# Altium PCB PCB1.PcbDoc
Units mm, origin at the board's own origin, x right, y up, seen from the top; angles counter-clockwise.
Board outline 85.6 x 54 mm, 2 copper layers (Top Layer, Bottom Layer), stack 0.871 mm thick; 37 components, 35 nets, 188 pads, 12 vias.
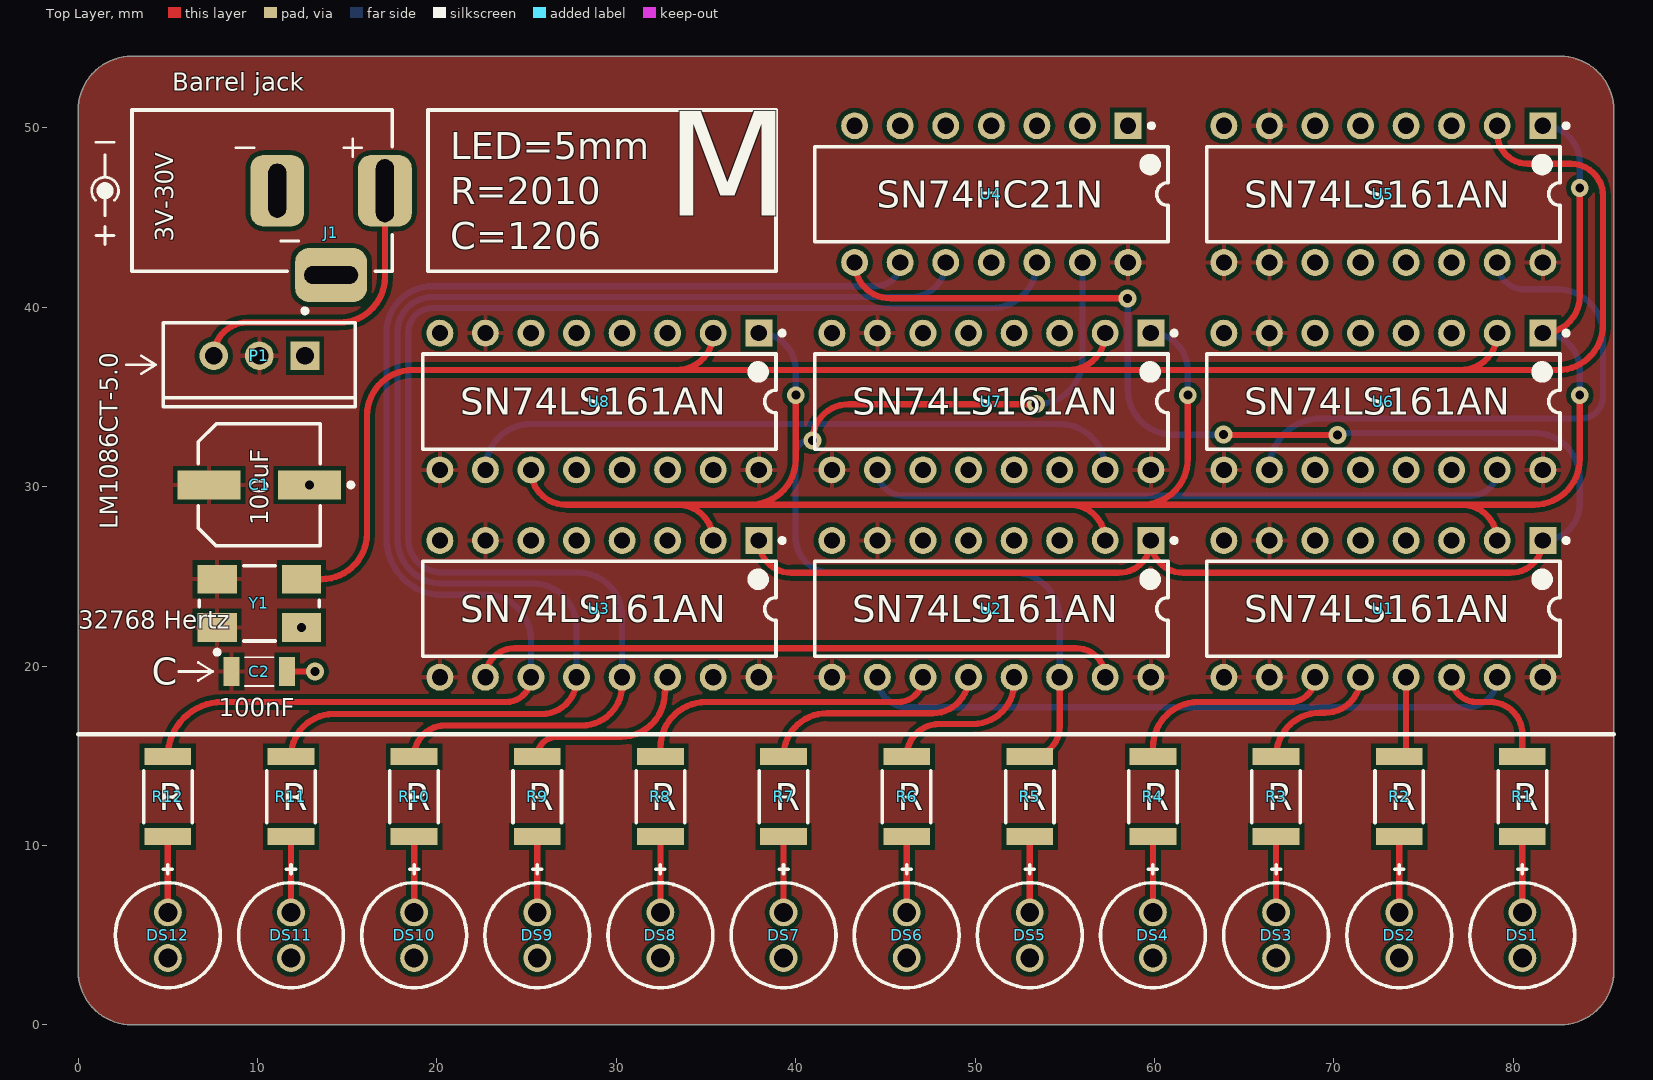
[diagram p0: Top Layer view]
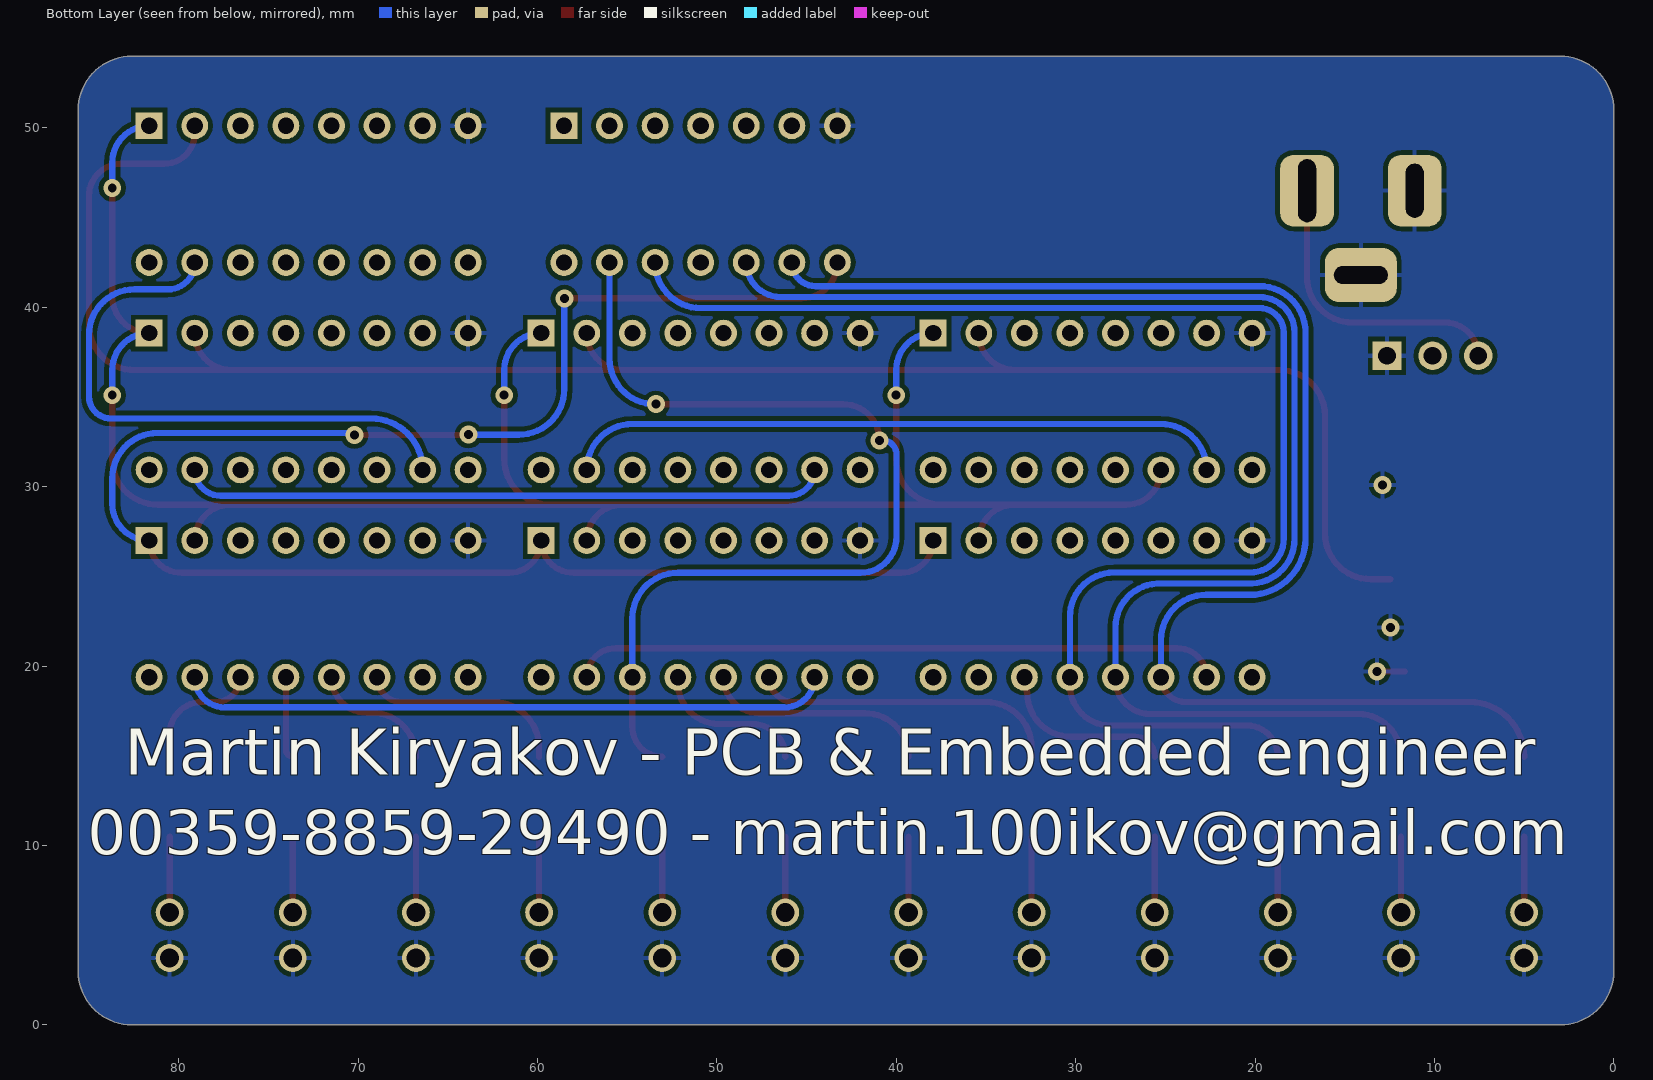
[diagram p1: Bottom Layer view, seen from below]

## Layer stack, top to bottom
Top Solder: solder mask 0.0102, Solder Resist, Dk 3.5
Top Layer: signal copper 0.0356
Dielectric 1: dielectric 0.8, FR-4, Dk 4.8
Bottom Layer: signal copper 0.0356
Bottom Solder: solder mask 0.0102, Solder Resist, Dk 3.5

## Board outline
0,3 0,51 cw(c3,51) 3,54 82.6,54 cw(c82.6,51) 85.6,51 85.6,3 cw(c82.6,3) 82.6,0 3,0 cw(c3,3)

## Design rules (kind name [scope] priority, off if disabled: settings)
Clearance [All] p1: gap=0.254 ignorepadtopadclearanceinfootprint=FALSE except(0: Arc-Hole Track-Hole SMDPad-Hole THPad-Hole Via-Hole Fill-Hole Poly-Hole Region-Hole Text-Hole)
HoleSize [All] p1: absolutevalues=TRUE maxlimit=5 minlimit=0.025 maxpercent=80.000 minpercent=20.000
PolygonConnect [All] p1: connectstyle=Relief reliefconductorwidth=0.254 reliefentries=4 polygonreliefangle="90 Angle" airgapwidth=0.254
RoutingVias [All] p1: holewidth=0.5 width=1 viastyle="Through Hole" minholewidth=0.5 minwidth=1 maxholewidth=1.5 maxwidth=3
SilkToSolderMaskClearance [IsPad] p1: minsilkscreentomaskgap=0.15 clearancetoexposedcopper=TRUE
SolderMaskExpansion [All] p1: expansion=0.102 istentingtop=FALSE
Width [All] p1: maxlimit=1 minlimit=0.2 preferedwidth=0.5
28 further rules are at their usual default settings.

## Components (designator, comment, footprint, x,y, rotation, side; value= is the part's Value field where it differs from the comment)
C1 "16SVPC100M" FP-OS-CON-SMT-C6-MFG 10.1,30.1 r180 top
C2 "WurthElektronik_885012208030" WurthElektronik_885012208030-Footprint-1 10.1,19.7 r0 top value=100nF
DS1 "HLMP-3507" AVAG-HLMP-3507 80.5,5 r270 top
DS2 "HLMP-3507" AVAG-HLMP-3507 73.636,5 r270 top
DS3 "HLMP-3507" AVAG-HLMP-3507 66.773,5 r270 top
DS4 "HLMP-3507" AVAG-HLMP-3507 59.909,5 r270 top
DS5 "HLMP-3507" AVAG-HLMP-3507 53.045,5 r270 top
DS6 "HLMP-3507" AVAG-HLMP-3507 46.182,5 r270 top
DS7 "HLMP-3507" AVAG-HLMP-3507 39.318,5 r270 top
DS8 "HLMP-3507" AVAG-HLMP-3507 32.455,5 r270 top
DS9 "HLMP-3507" AVAG-HLMP-3507 25.591,5 r270 top
DS10 "HLMP-3507" AVAG-HLMP-3507 18.727,5 r270 top
DS11 "HLMP-3507" AVAG-HLMP-3507 11.864,5 r270 top
DS12 "HLMP-3507" AVAG-HLMP-3507 5,5 r270 top
J1 "SparkFun_PRT-00119" SparkFun_PRT-00119-Footprint-1 14.1,44.15 r180 top
P1 "LM1086CT-5.0/NOPB" NDE0003A 10.1,37.3 r180 top
R1 "CRGP2010F100R" FP-CRGP2010-IPC_C 80.5,12.727 r270 top value=100Ω
R2 "CRGP2010F100R" FP-CRGP2010-IPC_C 73.636,12.727 r270 top value=100Ω
R3 "CRGP2010F100R" FP-CRGP2010-IPC_C 66.773,12.727 r270 top value=100Ω
R4 "CRGP2010F100R" FP-CRGP2010-IPC_C 59.909,12.727 r270 top value=100Ω
R5 "CRGP2010F100R" FP-CRGP2010-IPC_C 53.045,12.727 r270 top value=100Ω
R6 "CRGP2010F100R" FP-CRGP2010-IPC_C 46.182,12.727 r270 top value=100Ω
R7 "CRGP2010F100R" FP-CRGP2010-IPC_C 39.318,12.727 r270 top value=100Ω
R8 "CRGP2010F100R" FP-CRGP2010-IPC_C 32.455,12.727 r270 top value=100Ω
R9 "CRGP2010F100R" FP-CRGP2010-IPC_C 25.591,12.727 r270 top value=100Ω
R10 "CRGP2010F100R" FP-CRGP2010-IPC_C 18.727,12.727 r270 top value=100Ω
R11 "CRGP2010F100R" FP-CRGP2010-IPC_C 11.864,12.727 r270 top value=100Ω
R12 "CRGP2010F100R" FP-CRGP2010-IPC_C 5,12.727 r270 top value=100Ω
U1 "SN74LS161AN" N0016A 72.75,23.19 r270 top
U2 "SN74LS161AN" N0016A 50.9,23.19 r270 top
U3 "SN74LS161AN" N0016A 29.05,23.19 r270 top
U4 "SN74HC21N" N0014A 50.9,46.31 r270 top
U5 "SN74LS161AN" N0016A 72.75,46.31 r270 top
U6 "SN74LS161AN" N0016A 72.75,34.75 r270 top
U7 "SN74LS161AN" N0016A 50.9,34.75 r270 top
U8 "SN74LS161AN" N0016A 29.05,34.75 r270 top
Y1 "ECS-327SMO-TR" FP-327SMO-MFG 10.1,23.5 r0 top

## Footprints (in the part's own frame and the unit in brackets; to place one, negate y for a bottom-side part, rotate by r counter-clockwise, add the part's x,y. Pads: shape width x height; smd on the part's side, far side on the other; paste and mask are expansions set on the pad)
AVAG-HLMP-3507 [mm] "THD, 2-Leads, Dia 5.845mm, Pitch 2.54mm"
  round 1.55 hole 1.05: 1(-1.27,0) 2(1.27,0)
  silkscreen extent -3.92,-2.92 2.92,2.92
FP-327SMO-MFG [mm]
  rect 2.2x1.6 smd paste+0 mask+0: 1(-2.35,-1.35) 2(2.35,-1.35) 3(2.35,1.35) 4(-2.35,1.35)
  silkscreen extent -3.35,-2.85 3.35,2.1, body extent -3.55,-2.25 3.55,2.25, height 0.25
FP-CRGP2010-IPC_C [mm]
  rect 0.958x2.606 smd paste+0 mask+0: 1(-2.227,0) 2(2.227,0)
  silkscreen extent -1.45,-1.35 1.45,1.35, body extent -2.81,-1.45 2.81,1.45, height 0.25
FP-OS-CON-SMT-C6-MFG [mm]
  rect 3.5x1.6 smd paste+0 mask+0: 1(-2.8,0) 2(2.8,0)
  silkscreen extent -5.23,-3.4 3.4,3.4, body extent -4.8,-3.65 4.8,3.65, height 0.25
N0014A [mm] "DIP, 14-Leads, Body 19.7x6.6mm, Pitch 2.54mm"
  rect 1.5x1.5 hole 0.9: 1(-3.81,7.62)
  round 1.5 hole 0.9: 2(-3.81,5.08) 3(-3.81,2.54) 4(-3.81,0) 5(-3.81,-2.54) 6(-3.81,-5.08) 7(-3.81,-7.62) 8(3.81,-7.62) 9(3.81,-5.08) 10(3.81,-2.54) 11(3.81,0) 12(3.81,2.54) 13(3.81,5.08) 14(3.81,7.62)
  silkscreen extent -3.93,-9.85 2.65,9.85, body extent -3.95,-9.85 3.95,9.85, height 5.08
N0016A [mm] "DIP, 16-Leads, Body 19.7x6.6mm, Pitch 2.54mm"
  rect 1.5x1.5 hole 0.9: 1(-3.81,8.89)
  round 1.5 hole 0.9: 2(-3.81,6.35) 3(-3.81,3.81) 4(-3.81,1.27) 5(-3.81,-1.27) 6(-3.81,-3.81) 7(-3.81,-6.35) 8(-3.81,-8.89) 9(3.81,-8.89) 10(3.81,-6.35) 11(3.81,-3.81) 12(3.81,-1.27) 13(3.81,1.27) 14(3.81,3.81) 15(3.81,6.35) 16(3.81,8.89)
  silkscreen extent -3.93,-9.85 2.65,10.32, body extent -3.95,-9.85 3.95,9.85, height 5.08
NDE0003A [mm] "FM, 3-Leads, Body 10.7x4.7mm, Pitch 2.54mm"
  rect 1.6x1.6 hole 1: 1(-2.54,0)
  round 1.6 hole 1: 2(0,0) 3(2.54,0)
  silkscreen extent -5.35,-2.62 5.35,2.85, body extent -5.4,-1.9 5.4,2.9, height 19.4
SparkFun_PRT-00119-Footprint-1 [mm]
  rrect50% 3x4 hole 1 slot 3.5 at 90 deg: 1(-3,-2.35)
  rrect50% 3x4 hole 1 slot 3 at 90 deg: 2(3,-2.35)
  rrect50% 4x3 hole 1 slot 3 at 0 deg: 3(0,2.35)
  body extent -3.5,-6.95 10.7,2.6, height 11
WurthElektronik_885012208030-Footprint-1 [mm]
  rect 0.9x1.6 smd: 1(-1.55,0) 2(1.55,0)
  silkscreen extent -0.8,-0.8 0.8,0.8, body extent -1.6,-0.8 1.6,0.8, height 1.1

## Part data
C1: library part CMP-05428-000037-2, "Conductive Polymer Aluminum Solid Capacitors (OS-CON) 100uF ±20% 16V", Capacitance=100uF, Case/Package=Radial, ESR (Equivalent Series Resistance)=24mR, Leakage Current=300uA, Max Operating Temperature=105°C, Min Operating Temperature=-55°C, Package Quantity=1000, Ripple Current=2.49A, Tolerance=20%, Voltage=16V, Construction=Cylindrical, Diameter=6.3mm, Dissipation Factor=12%, Height=5.9mm, Height - Seated (Max)=0.236inch, Lead Free="Lead Free", Length=5.9mm, Life (Hours)=2000Hour, Mount="Surface Mount", Number of Pins=6, Packaging="Tape and Reel", Polarity=Polar, Radiation Hardening=No, REACH SVHC="No SVHC", Ripple Current (AC)=2.49A, RoHS Compliant=Yes, Series="OS-CON™, SVPC", Termination=SMD/SMT, Voltage Rating=16V, Voltage Rating (DC)=16V
C2: library part CMP-001-00092-1, "Cap, 0.1ΜF, 16V, 10%, X7R, 1206", Capacitance=100nF, Case Code (Imperial)=1206, Case Code (Metric)=3216, Case/Package=1206, Composition=Ceramic, RoHS Compliant=Yes
DS1 DS2 DS3 DS4 DS5 DS6 DS7 DS8 DS9 DS10 DS11 DS12: library part CMP-2000-06412-1, "T-1 3/4 (5 mm) Diffused LED Lamp, Green, 2.1 V, -20 to 100 degC, 2-Pin THD, RoHS, Bulk", Emitting Color=YellowGreen, Forward Current=25mA, Forward Voltage=2.7V, Manufacturer=Avago, Operating Temp Range=-40Cto100C, Operating Temperature Classification=Industrial, Package Description="2-Pin Through Hole Device, Dia 5.845 mm, Pitch 2.54 mm", Package Type=T-13/4, Power Dissipation=85W, Reverse Voltage=5V, Test Current (It)=10mA, Chip Material=GaP, Datasheet URL=http://docs.avagotech.com/docs/AV02-1558EN, Datasheet Version=03/2015, DELETED=Compliant, Dominant Wave Length=569nm, High Brightness=No, Lens Dimensions=5.08x5.08x8.3mm, Lens Type=ColoredDiffused, Lum Intensity=4.2mcd, Luminous Intensity=4.2mcd, Main Category=StandardLED, Manufacturer URL=http://www.avagotech.com/, Mounting=ThroughHole, Mounting Technology=ThroughHole, Number of  Elements=1, Package Reference=HLMP-3507, Peak Wavelength=565nm, Pin Count=2, Product Depth (mm)=6.1mm, Product Height (mm)=9.19mm, Product Length (mm)=6.1mm, Rad Hardened=No, Shape Type=Circular, Type=Uni-Color, Viewing Angle=60deg
J1: library part CMP-002-00115-3, "Simple 6.5mm barrel jack connector", Manufacturer=SparkFun, MPN=PRT-00119, Connector Type=Barrel, Gender=Receptacle, Mounting Technology=THT, Pins=3
P1: library part CMP-0062-02515-3, "1.5A Low Dropout Positive Regulators, 3-pin TO-220, Pb-Free", Manufacturer="Texas Instruments", PackageTopMarking=NSUZXYTTE#*LM1086*CT-5.0, PowerWise=N, ComponentLink1Description="Datasheet URL", ComponentLink1URL=http://www.ti.com/general/docs/lit/getliterature.tsp?genericPartNumber=LM1086&fileType=pdf, CompType="LDO IC", PackageDescription="TO-220, Molded, 3 Lead, Straight", PackageReference=NDE0003A, PinCount=3, RoHS=Y
R1 R2 R3 R4 R5 R6 R7 R8 R9 R10 R11 R12: library part CMP-03211-004382-1, "CRGP2010 100Ω 1.25W ±100ppm/°C 1% 400V", Ambient Temperature Range High=+70°C, Manufacturer=TE, Package=CRGP2010, Power Rating=1.25W, Resistance=100Ω, Temperature="-55°C to +155°C", Temperature Coefficient=±100ppm/°C, Temperature Range High=+155°C, Temperature Range Low=-55°C, Tolerance=0.01, Voltage Rating=400V, Automotive=No, Category=Res, ComponentLink2Description=Datasheet, ComponentLink2URL=https://www.mouser.ca/datasheet/2/418/NG_DS_9-1773463-9_A-1358566.pdf, Composition="Thick Film", Device Class L1="Passive Components", Device Class L2=Resistors, Device Class L3="Chip SMD Resistors", Height=0.65mm, Ipc Land Pattern Name=RESC500250X55, Lead Free=Yes, Manufacturer Part Number=CRGP2010F100R, Octopart=https://octopart.com/crgp2010f100r-te+connectivity-91018964, RoHS=TRUE, Series=CRGP
U1 U2 U3 U5 U6 U7 U8: library part CMP-1623-00512-2, "Synchronous 4-Bit Binary Counters, N0016A, TUBE", F @ Nom Voltage(Max)(Mhz)=35, Generic Part Number=SN74LS161A, ICC @ Nom Voltage(Max)(mA)=32, Manufacturer="Texas Instruments", Operating Temperature Range(C)="0 to 70", Rating=Catalog, Voltage(Nom)(V)=5, Bits(#)=4, Code_JEDEC=MS-001, DatasheetVersion=SDLS060, Function=Counter, Input Type=TTL, Inputs=1, Output Drive (IOL/IOH)(Max)(mA)=8/-0.4, Output Type=CMOS, PackageReference=N0016A, Schmitt Trigger=No, Technology Family=LS, tpd @ Nom Voltage(Max)(ns)=35, Type=Binary, VCC(Max)(V)=5.25, VCC(Min)(V)=4.75
U4: library part CMP-0777-00258-3, "Dual 4-Input Positive-AND Gates, N0014A, TUBE", F @ Nom Voltage(Max)(Mhz)=70, Generic Part Number=SN74HC21, ICC @ Nom Voltage(Max)(mA)=0.02, Manufacturer="Texas Instruments", Operating Temperature Range(C)="-40 to 85", Rating=Catalog, tpd @ Nom Voltage(Max)(ns)=28, Voltage(Nom)(V)=5, Bits(#)=2, DatasheetVersion=SCLS087E, Input Type=CMOS, Output Type=CMOS, PackageReference=N0014A, Schmitt Trigger=No, Technology Family=HC, VCC(Max)(V)=6, VCC(Min)(V)=2
Y1: library part CMP-40224-000035-1, "XTAL OSC XO 32.7680KHZ CMOS SMD", Case/Package=SMD/SMT, Frequency=32.768kHz, Frequency Stability=30ppm, Load Capacitance=15pF, Max Operating Temperature=85°C, Max Supply Current=15uA, Min Operating Temperature=-10°C, Operating Supply Voltage=3.3V, Package Quantity=1, Height=0.079inch, Lead Free="Lead Free", Length=0.256inch, Mount="Surface Mount", Packaging="Tape and Reel", RoHS Compliant=Yes, Series=ECS-327SMO, Termination=SMD/SMT, Width=0.158inch

## Via types
v1: diameter 1, hole 0.5, Top Layer to Bottom Layer, 12 vias

## Nets (pads, with @x,y where several pads share a name; then routed paths per layer and width w, separated by ;. In a path a pad name is that pad's centre, name@x,y a point inside that pad or via, vN(x,y) a via of type N, cw(c..) or ccw(c..) an arc to the next point about the centre after c; other vN are vias at no path point)
+5: C1.2 C2.1 P1.2 U1.7 U1.9 U1.10 U1.16 U2.7 U2.9 U2.16 U3.7 U3.9 U3.16 U4.14 U5.7 U5.9 U5.10 U5.16 U6.7 U6.9 U6.16 U7.7 U7.9 U7.16 U8.7 U8.9 U8.16 Y1.1 Y1.4
AND_BIT_0: R5.1 U2.14 U4.13 | length 59
  Top Layer w0.35: v1(40.929,32.571) cw(c42.958,32.571) 42.958,34.6 v1(53.4,34.6) ; R5.1 ccw(c53.045,16.619) 54.71,16.619 U2.14
  Bottom Layer w0.35: v1(40.929,32.571) 40.8,32.6 ccw(c40.8,31.779) 39.979,31.779 39.979,27.221 ccw(c42,27.221) 42,25.2 52.17,25.2 ; v1(53.4,34.6) 53.44,34.6 ccw(c53.44,37.14) 55.98,37.14 U4.13 ; U2.14 54.71,22.66 ; 52.17,25.2 cw(c52.17,22.66) 54.71,22.66 ; 52.17,25.2 cw(c52.17,22.66) 54.71,22.66
AND_BIT_1: R10.1 U3.13 U4.12 | length 97.3
  Top Layer w0.35: R10.1 cw(c20.466,14.954) 20.466,16.693 28.073,16.693 ; U3.13 U3.13@30.32,18.94 ; 28.073,16.693 ccw(c28.073,18.94) U3.13@30.32,18.94 ; 28.073,16.693 ccw(c28.073,18.94) U3.13@30.32,18.94
  Bottom Layer w0.35: U3.13 30.32,22.76 ; 18.4,27.1 ccw(c20.286,27.1) 20.286,25.214 ; 18.4,27.1 ccw(c20.286,27.1) 20.286,25.214 ; 18.4,27.1 18.4,38.6 ; 18.4,38.6 cw(c19.756,38.6) 19.756,39.956 ; 18.4,38.6 cw(c19.756,38.6) 19.756,39.956 ; 19.756,39.956 50.896,39.956 ; 20.286,25.214 27.866,25.214 ; 27.866,25.214 cw(c27.866,22.76) 30.32,22.76 ; 27.866,25.214 cw(c27.866,22.76) 30.32,22.76 ; 50.896,39.956 ccw(c50.896,42.5) U4.12 cw(c50.896,42.5) 50.896,39.956
AND_BIT_2: R11.1 U3.12 U4.10 | length 89
  Top Layer w0.35: U3.12@27.776,19.38 cw(c25.838,19.273) 25.838,17.332 14.241,17.332 ; 14.241,17.332 ccw(c14.241,14.954) R11.1 cw(c14.241,14.954) 14.241,17.332
  Bottom Layer w0.35: U3.12 27.78,22.16 ccw(c25.336,22.16) 25.482,24.6 22.954,24.6 22.95,24.604 20.155,24.604 ; U4.10 cw(c46.438,42.5) 46.438,40.578 19.774,40.578 ; 17.796,27.1 ccw(c20.296,27.1) 20.155,24.604 ; 17.796,27.1 ccw(c20.296,27.1) 20.155,24.604 ; 17.796,27.1 17.796,38.6 ; 17.796,38.6 cw(c19.774,38.6) 19.774,40.578 ; 17.796,38.6 cw(c19.774,38.6) 19.774,40.578
AND_BIT_3: R12.1 U3.11 U4.9 | length 80.8
  Top Layer w0.35: R12.1 cw(c8.039,14.961) 8.039,18 23.86,18 ; 23.86,18 ccw(c23.86,19.38) U3.11 cw(c23.86,19.38) 23.86,18
  Bottom Layer w0.35: U3.11 25.24,21.46 ccw(c22.719,21.46) 22.719,23.981 19.995,23.981 cw(c20.329,27.1) 17.192,27.1 17.192,38.6 cw(c19.632,38.6) 17.192,38.605 17.192,38.85 ; U4.9 cw(c44.502,42.5) 44.502,41.182 41.43,41.182 19.524,41.182 ; 17.192,38.85 ccw(c16.867,38.979) 17.214,38.933 ; 17.192,38.85 ccw(c16.867,38.979) 17.214,38.933 ; 17.214,38.933 cw(c19.774,38.6) 19.441,41.16 ; 19.441,41.16 ccw(c19.395,41.507) 19.524,41.182 ; 19.441,41.16 ccw(c19.395,41.507) 19.524,41.182
CLK_1HZ: U1.2 U2.2 U3.2 U5.1 U6.1 U7.1 U8.1 U8.11 | length 140.8
  Top Layer w0.35: U8.11 ccw(c27.18,30.94) 27.18,29 33.4,29 ; 37.469,29 cw(c37.46,31.54) 37.46,29 ; 37.47,29 ccw(c37.46,31.54) 40,31.54 ; v1(40,35.1) 40,31.54 ; v1(61.85,35.1) 61.85,31.54 ; U6.1 ccw(c81.64,40.62) 83.7,40.62 v1(83.7,46.66) ; v1(83.7,35.1) 83.7,31.54 cw(c81.16,31.54) 81.16,29 77.1,29 ; 33.4,29 cw(c33.4,27) U3.2 ccw(c33.4,27) 33.4,29 ; 33.4,29 37.46,29 ; 37.46,29 ccw(c37.46,31.54) 40,31.54 ; 37.46,29 55.25,29 ; 55.25,29 cw(c55.25,27) U2.2 ccw(c55.25,27) 55.25,29 ; 55.25,29 59.31,29 ; 59.31,29 ccw(c59.31,31.54) 61.85,31.54 ; 59.31,29 ccw(c59.31,31.54) 59.316,29 ccw(c59.31,31.54) 59.319,29 ccw(c59.31,31.54) 61.85,31.54 ; 59.31,29 77.1,29 ; 77.1,29 cw(c77.1,27) U1.2 ccw(c77.1,27) 77.1,29
  Bottom Layer w0.35: U8.1 cw(c37.94,36.5) 40,36.5 v1(40,35.1) ; U7.1 cw(c59.79,36.5) 61.85,36.5 v1(61.85,35.1) ; v1(83.7,35.1) 83.7,36.5 ; v1(83.7,46.66) 83.7,48.06 ; 83.7,36.5 ccw(c81.64,36.5) U6.1 cw(c81.64,36.5) 83.7,36.5 ; 83.7,48.06 ccw(c81.64,48.06) U5.1 cw(c81.64,48.06) 83.7,48.06
CLK_OSCILL: U5.2 U6.2 U7.2 U8.2 Y1.3 | length 125
  Top Layer w0.35: Y1.3 13.56,24.85 ccw(c13.56,27.39) 16.1,27.39 16.1,33.96 cw(c18.64,33.96) 18.64,36.5 33.34,36.5 ; U5.2 U5.2@79.1,49.7 ; 33.34,36.5 ccw(c33.34,38.56) U8.2 cw(c33.34,38.56) 33.34,36.5 ; 33.34,36.5 55.19,36.5 ; 55.19,36.5 ccw(c55.19,38.56) U7.2 cw(c55.19,38.56) 55.19,36.5 ; 55.19,36.5 77.04,36.5 ; 77.04,36.5 ccw(c77.04,38.56) U6.2 cw(c77.04,38.56) 77.04,36.5 ; 77.04,36.5 82.46,36.5 ; U5.2@79.1,49.7 ccw(c80.8,49.7) 80.8,48 ; U5.2@79.1,49.7 ccw(c80.8,49.7) 80.8,48 ; 80.8,48 83.2,48 cw(c83.2,46.2) 85,46.2 85,39.04 ; 82.46,36.5 ccw(c82.46,39.04) 85,39.04 ; 82.46,36.5 ccw(c82.46,39.04) 85,39.04
CLR_LOGIC: U1.1 U2.1 U3.1 U4.8 | length 102.1
  Top Layer w0.35: U3.1 ccw(c39.74,27) 39.74,25.2 57.99,25.2 ccw(c57.99,27) U2.1 ccw(c61.59,27) 61.59,25.2 79.84,25.2 ccw(c79.84,27) U1.1 ; U4.8 ccw(c45.28,42.5) 45.28,40.5 v1(58.5,40.5) ; v1(63.845,32.9) 63.859,32.886 70.185,32.886 v1(70.2,32.871)
  Bottom Layer w0.35: v1(58.5,40.5) 58.5,35.44 ccw(c61.04,35.44) 61.04,32.9 v1(63.845,32.9) ; v1(70.2,32.871) 70.2,33 81.16,33 cw(c81.16,30.46) 83.7,30.46 83.7,29.06 cw(c81.64,29.06) U1.1
GND: C1.1 C2.2 DS1.2 DS2.2 DS3.2 DS4.2 DS5.2 DS6.2 DS7.2 DS8.2 DS9.2 DS10.2 DS11.2 DS12.2 J1.2 J1.3 P1.1 U1.8 U2.8 U3.8 U4.7 U5.8 U6.8 U7.8 U8.8 Y1.2 | length 1.6
  Top Layer w0.35: C2.2 v1(13.2,19.7)
  other v1: 12.45,22.15 12.9,30.1
NetDS1_1: DS1.1 R1.2 | length 4.2
  Top Layer w0.35: DS1.1 R1.2
NetDS2_1: DS2.1 R2.2 | length 4.2
  Top Layer w0.35: DS2.1 R2.2
NetDS3_1: DS3.1 R3.2 | length 4.2
  Top Layer w0.35: DS3.1 R3.2
NetDS4_1: DS4.1 R4.2 | length 4.2
  Top Layer w0.35: DS4.1 R4.2
NetDS5_1: DS5.1 R5.2 | length 4.2
  Top Layer w0.35: DS5.1 R5.2
NetDS6_1: DS6.1 R6.2 | length 4.2
  Top Layer w0.35: DS6.1 R6.2
NetDS7_1: DS7.1 R7.2 | length 4.2
  Top Layer w0.35: DS7.1 R7.2
NetDS8_1: DS8.1 R8.2 | length 4.2
  Top Layer w0.35: DS8.1 R8.2
NetDS9_1: DS9.1 R9.2 | length 4.2
  Top Layer w0.35: DS9.1 R9.2
NetDS10_1: DS10.1 R10.2 | length 4.2
  Top Layer w0.35: DS10.1 R10.2
NetDS11_1: DS11.1 R11.2 | length 4.2
  Top Layer w0.35: DS11.1 R11.2
NetDS12_1: DS12.1 R12.2 | length 4.2
  Top Layer w0.35: DS12.1 R12.2
NetR1_1: R1.1 U1.14 | length 12
  Top Layer w0.35: R1.1 80.5,16.2 ; 77.94,18 cw(c77.94,19.38) U1.14 ccw(c77.94,19.38) 77.94,18 ; 77.94,18 78.7,18 ; 78.7,18 cw(c78.7,16.2) 80.5,16.2 ; 78.7,18 cw(c78.7,16.2) 80.5,16.2
NetR2_1: R2.1 U1.13 | length 4.6
  Top Layer w0.35: R2.1 ccw(c73.636,15.338) 74.02,15.338 U1.13
NetR3_1: R3.1 U1.12 | length 10.3
  Top Layer w0.35: R3.1 cw(c69.219,14.954) 69.219,17.4 69.5,17.4 ; 69.5,17.4 ccw(c69.5,19.38) U1.12 cw(c69.5,19.38) 69.5,17.4
NetR4_1: R4.1 U1.11 | length 17.9
  Top Layer w0.35: R4.1 59.909,15.46 ; 59.909,15.46 cw(c62.449,15.46) 62.449,18 ; 59.909,15.46 cw(c62.449,15.46) 62.449,18 ; 62.449,18 67.56,18 ; 67.56,18 ccw(c67.56,19.38) U1.11 cw(c67.56,19.38) 67.56,18
NetR6_1: R6.1 U2.13 | length 11.5
  Top Layer w0.35: U2.13@52.148,19.377 cw(c49.872,19.072) 49.872,16.777 48.005,16.777 ; 48.005,16.777 ccw(c48.005,14.954) R6.1 cw(c48.005,14.954) 48.005,16.777
NetR7_1: R7.1 U2.12 | length 19.8
  Top Layer w0.35: 41.742,17.378 ccw(c41.742,14.954) R7.1 cw(c41.742,14.954) 41.742,17.378 ; 41.742,17.378 47.628,17.378 ; 47.628,17.378 ccw(c47.628,19.38) U2.12 cw(c47.628,19.38) 47.628,17.378
NetR8_1: R8.1 U2.11 | length 23.5
  Top Layer w0.35: R8.1 32.455,15.46 ; 32.455,15.46 cw(c34.995,15.46) 34.995,18 ; 32.455,15.46 cw(c34.995,15.46) 34.995,18 ; 34.995,18 45.71,18 ; 45.71,18 ccw(c45.71,19.38) U2.11 cw(c45.71,19.38) 45.71,18
NetR9_1: R9.1 U3.14 | length 11.8
  Top Layer w0.35: U3.14 32.7,18.5 cw(c30.265,18.5) 30.265,16.065 26.702,16.065 ; 26.702,16.065 ccw(c26.702,14.954) R9.1 cw(c26.702,14.954) 26.702,16.065
NetU1_15: U1.15 U2.10 | length 36.5
  Bottom Layer w0.35: U2.10 ccw(c46.23,19.38) 46.23,17.7 77.42,17.7 ccw(c77.42,19.38) U1.15
NetU2_15: U2.15 U3.10 | length 36.4
  Top Layer w0.35: U3.10 cw(c24.32,19.38) 24.32,21 55.63,21 cw(c55.63,19.38) U2.15
NetU5_15: U5.15 U6.10 | length 34.9
  Bottom Layer w0.35: U6.10 cw(c69.26,30.94) 69.26,33.8 83.76,33.8 ccw(c83.76,35.04) 85,35.04 85,38.46 ccw(c82.46,38.46) 82.46,41 80.6,41 ; 80.6,41 cw(c80.6,42.5) U5.15 ccw(c80.6,42.5) 80.6,41
NetU6_15: U6.15 U7.10 | length 40.7
  Bottom Layer w0.35: 45.99,29.5 cw(c45.99,30.94) U7.10 ccw(c45.99,30.94) 45.99,29.5 ; 45.99,29.5 77.66,29.5 ; 77.66,29.5 ccw(c77.66,30.94) U6.15 cw(c77.66,30.94) 77.66,29.5
NetU7_15: U7.15 U8.10 | length 37.5
  Bottom Layer w0.35: U8.10 cw(c25.26,30.94) 25.26,33.5 54.69,33.5 cw(c54.69,30.94) U7.15
VCC: J1.1 P1.3 | length 19.8
  Top Layer w0.35: J1.1 17.1,41.69 cw(c14.56,41.69) 14.56,39.15 9.41,39.15 ; 9.41,39.15 ccw(c9.41,37.3) P1.3 cw(c9.41,37.3) 9.41,39.15
pads on no net: U1.3 U1.4 U1.5 U1.6 U2.3 U2.4 U2.5 U2.6 U3.3 U3.4 U3.5 U3.6 U3.15 U4.1 U4.2 U4.3 U4.4 U4.5 U4.6 U4.11 U5.3 U5.4 U5.5 U5.6 U5.11 U5.12 U5.13 U5.14 U6.3 U6.4 U6.5 U6.6 U6.11 U6.12 U6.13 U6.14 U7.3 U7.4 U7.5 U7.6 U7.11 U7.12 U7.13 U7.14 U8.3 U8.4 U8.5 U8.6 U8.12 U8.13 U8.14 U8.15

## Polygon pours and split planes (outlines as drawn)
+5 on Top Layer "+5_L01_P000" (solid, remove dead copper, pour order 0): 0,3 0,51 cw(c3,51) 3,54 82.6,54 cw(c82.6,51) 85.6,51 85.6,3 cw(c82.6,3) 82.6,0 3,0 cw(c3,3)
GND on Bottom Layer "GND_L02_P001" (solid, remove dead copper, pour order 1): 0,3 0,51 cw(c3,51) 3,54 82.6,54 cw(c82.6,51) 85.6,51 85.6,3 cw(c82.6,3) 82.6,0 3,0 cw(c3,3)

## Silkscreen, mask and mechanical layers (free items; w line width, h text height)
Top Overlay:
  circle w0.5: c1.5,46.5 r0.224
  lines w0.15: 0.97,45.97 cw(c1.5,46.5) 2.03,45.97 ; 1,44 2,44 ; 1,49.2 2,49.2 ; 1.5,43.5 1.5,44.5 ; 1.5,45.1 1.5,46.5 ; 1.5,47.3 1.5,48.5 ; 2.675,36.8 4.325,36.8 ; 3.525,36.3 4.325,36.8 ; 3.525,37.3 4.325,36.8 ; 5.6,19.7 7.5,19.7 ; 6.7,19.2 7.5,19.7 ; 6.7,20.2 7.5,19.7 ; 8.8,48.9 9.8,48.9 ; 11.3,43.7 12.3,43.7 ; 14.8,48.9 15.8,48.9 ; 15.3,48.4 15.3,49.4
  lines w0.2: 11.647,42 3,42 3,51 17.5,51 17.5,48.953 ; 16.549,42 17.5,42 17.5,44.051 ; 19.5,42 38.9,42 38.9,51 19.5,51 19.5,42
  lines w0.25: 0,16.215 85.6,16.215
  text "Barrel jack" at 5.235,52.067 h1
  text "LED=5mm" at 20.75,48.25 h1.5
  text "R=2010" at 20.75,45.75 h1.5
  text "SN74HC21N" at 44.527,45.56 h1.5
  text "SN74LS161AN" at 65.003,45.56 h1.5
  text "3V-30V" at 5.3,43.668 h1 r90
  text "C=1206" at 20.75,43.25 h1.5
  text "M" at 32.762,43.186 h10
  text "SN74LS161AN" at 21.303,34 h1.5
  text "SN74LS161AN" at 43.153,34 h1.5
  text "SN74LS161AN" at 65.003,34 h1.5
  text "100uF" at 10.6,27.851 h1 r90
  text "LM1086CT-5.0" at 2.2,27.635 h1 r90
  text "SN74LS161AN" at 21.303,22.44 h1.5
  text "SN74LS161AN" at 43.153,22.44 h1.5
  text "SN74LS161AN" at 65.003,22.44 h1.5
  text "32768 Hertz" at 0.018,22.07 h1
  text "C" at 4.1,18.95 h1.5
  text "100nF" at 7.851,17.2 h1
  text "R" at 4.5,11.977 h1.5
  text "R" at 11.364,11.977 h1.5
  text "R" at 18.227,11.977 h1.5
  text "R" at 25.091,11.977 h1.5
  text "R" at 31.955,11.977 h1.5
  text "R" at 38.818,11.977 h1.5
  text "R" at 45.682,11.977 h1.5
  text "R" at 52.546,11.977 h1.5
  text "R" at 59.409,11.977 h1.5
  text "R" at 66.273,11.977 h1.5
  text "R" at 73.137,11.977 h1.5
  text "R" at 80,11.977 h1.5
Bottom Overlay:
  text "Martin Kiryakov - PCB & Embedded engineer" at 83,13.1 h4.4
  text "00359-8859-29490 - martin.100ikov@gmail.com" at 85.069,8.7 h4.2
Board Shape:
  the board outline again, w0.254